# Altium PCB PCB.PcbDoc
Units mm, origin at the board's own origin, x right, y up, seen from the top; angles counter-clockwise.
Board outline 55 x 20 mm, 2 copper layers (Top Layer, Bottom Layer), stack 1.571 mm thick; 48 components, 36 nets, 184 pads, 34 vias.
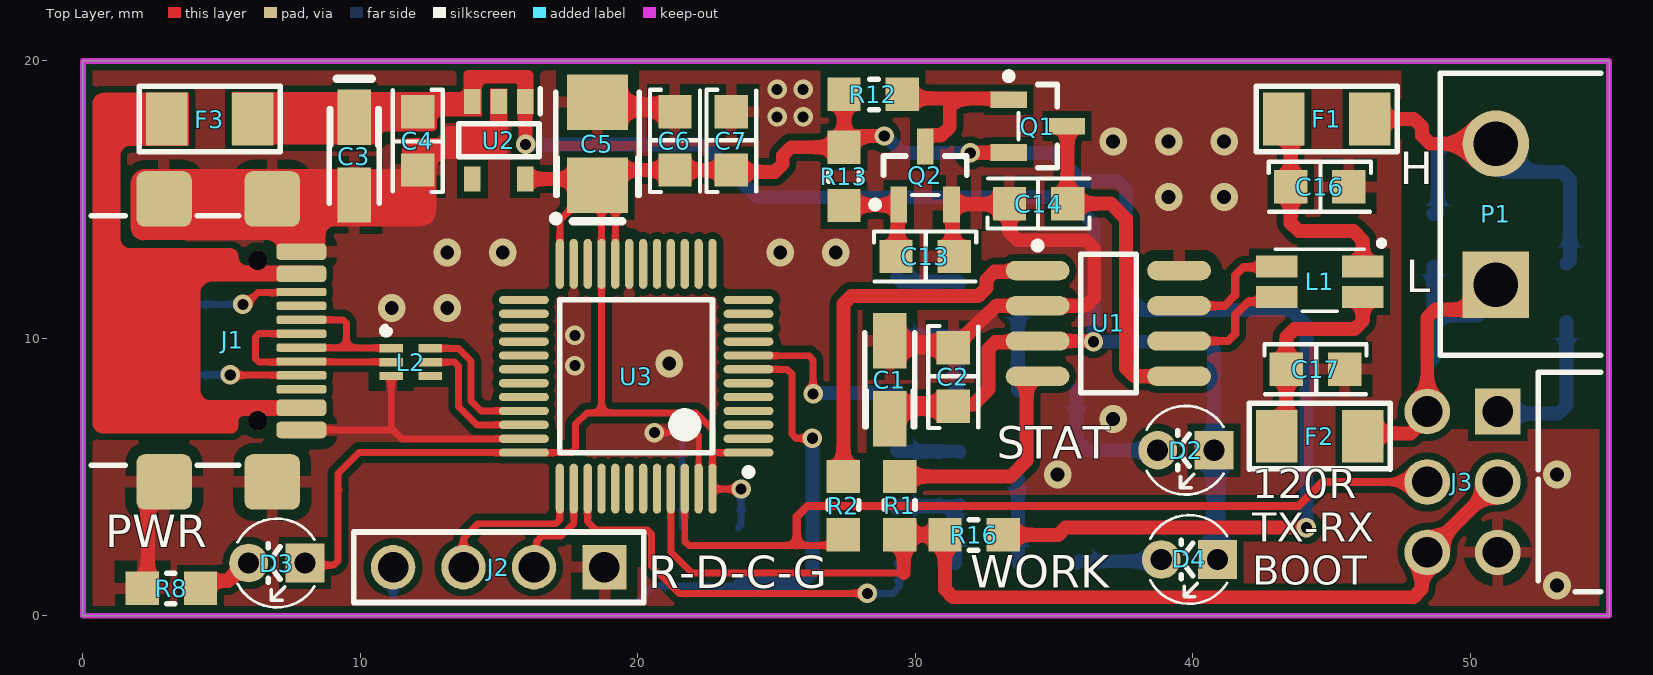
[diagram p0: Top Layer view]
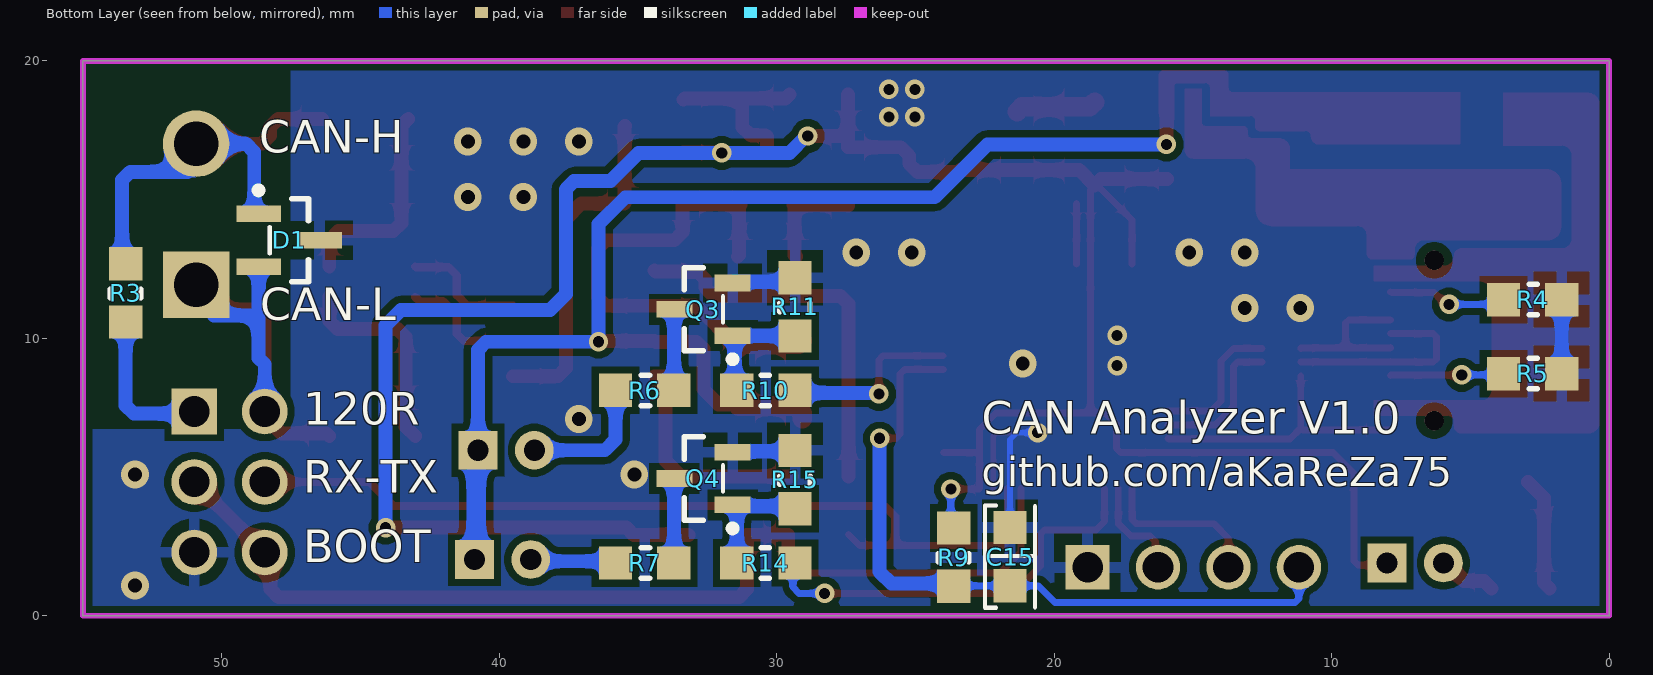
[diagram p1: Bottom Layer view, seen from below]

## Layer stack, top to bottom
Top Solder: solder mask 0.0102, Solder Resist, Dk 3.5
Top Layer: signal copper 0.0356
Dielectric 1: dielectric 1.5, FR-4, Dk 4.8
Bottom Layer: signal copper 0.0356
Bottom Solder: solder mask 0.0102, Solder Resist, Dk 3.5

## Board outline
0,0 55.003,0 55.003,20 0,20

## Design rules (kind name [scope] priority, off if disabled: settings)
AcuteAngle [All] p1: minimum=6.00000000000000E+0001 checktracksonly=TRUE
AssemblyTestPointUsage [All] p1 off:
AssemblyTestpoint [All] p1 off: testpointundercomponent=TRUE minsize=1.016 maxsize=2.54 preferedsize=1.524 minholesize=0 maxholesize=1.016 preferedholesize=0.813 testpointgrid=0.025 usegrid=TRUE gridtolerance=0 allowsidetop=TRUE allowsidebottom=TRUE
BoardOutlineClearance [All] p1: gap=0.2 ignorepadtopadclearanceinfootprint=FALSE
Clearance Poly_Clearance [All vs InPolygon] p1: gap=0.25 ignorepadtopadclearanceinfootprint=TRUE except(0.3: Arc-Hole Track-Hole SMDPad-Hole THPad-Hole Via-Hole Fill-Hole Poly-Hole Region-Hole Text-Hole)
Clearance [All] p2: gap=0.2 ignorepadtopadclearanceinfootprint=FALSE except(0.3: Arc-Hole Track-Hole SMDPad-Hole THPad-Hole Via-Hole Fill-Hole Poly-Hole Region-Hole Text-Hole)
FabricationTestPointUsage [All] p1 off: valid=0 allowmultiple=FALSE
FabricationTestpoint [All] p1 off: side=3 testpointundercomponent=TRUE minsize=1.016 maxsize=2.54 preferedsize=1.524 minholesize=0 maxholesize=1.016 preferedholesize=0.813 testpointgrid=0.025 allowsidetop=TRUE allowsidebottom=TRUE usegrid=TRUE gridtolerance=0
HoleSize [All] p1: absolutevalues=TRUE maxlimit=10 minlimit=0.4 maxpercent=80.000 minpercent=20.000
HoleToHoleClearance [All] p1: gap=0.3 allowstackedmicrovias=TRUE
MinimumAnnularRing [All] p1: minimumring=0.15
MinimumSolderMaskSliver [All] p1: minsoldermaskwidth=0.01
PolygonConnect [All] p1: thpad.connectstyle=Relief thpad.reliefconductorwidth=0.4 thpad.reliefentries=4 thpad.polygonreliefangle="90 Angle" thpad.airgapwidth=0.4 smdpad.connectstyle=Relief smdpad.reliefconductorwidth=0.4 smdpad.reliefentries=4 smdpad.polygonreliefangle="90 Angle" smdpad.airgapwidth=0.4 via.connectstyle=Direct via.reliefconductorwidth=0.254 via.reliefentries=4 via.polygonreliefangle="90 Angle" via.airgapwidth=0.254
RoutingVias [All] p1: holewidth=0.4 width=0.7 viastyle="Through Hole" minholewidth=0.4 minwidth=0.7 maxholewidth=3 maxwidth=6
SilkToSilkClearance [All] p1: silktosilkclearance=0
SilkToSolderMaskClearance [IsPad] p1: minsilkscreentomaskgap=0.01 clearancetoexposedcopper=TRUE
SolderMaskExpansion [All] p1: expansion=0.102 istentingtop=FALSE
Width [All] p1: maxlimit=10 minlimit=0.2 preferedwidth=0.3
21 further rules are at their usual default settings.

## Components (designator, comment, footprint, x,y, rotation, side; value= is the part's Value field where it differs from the comment)
C1 "10u" SMT_C_Tantalum_A 29.083,8.509 r90 top
C2 "100n" "CAP 0805/2012" 31.369,8.636 r90 top
C3 "4u7" SMT_C_Tantalum_A 9.779,16.57 r270 top
C4 "100n" "CAP 0805/2012" 12.065,17.096 r270 top
C5 "10u" SMT_C_Tantalum_B 18.542,17.018 r90 top
C6 "100n" "CAP 0805/2012" 21.336,17.145 r90 top
C7 "100n" "CAP 0805/2012" 23.368,17.145 r90 top
C13 "10u" "CAP 0805/2012" 30.378,12.954 r0 top
C14 "100n" "CAP 0805/2012" 34.417,14.859 r180 top
C15 "100n" "CAP 0805/2012" 21.59,2.159 r90 bottom
C16 "47p" "CAP 0805/2012" 44.602,15.469 r0 top
C17 "47p" "CAP 0805/2012" 44.45,8.89 r0 top
D1 "SM712" SOT23_M 47.574,13.538 r180 bottom
D2 "Yellow" LED-3mm_Yellow 39.751,5.969 r180 top
D3 "Green, 3'mm" led-3mm 6.985,1.905 r180 top
D4 "Red, 3'mm" LED-3mm(RED) 39.878,2.032 r180 top
F1 "200m" 1206_F 44.831,17.907 r0 top
F2 "200m" 1206_F 44.577,6.477 r0 top
F3 "250m" 1206_F 4.572,17.907 r0 top
J1 "16P" "USBC_SMD_16_USB4110 - Extended" 7.065,10.129 r90 top
J2 "4b" HDR_THT_4M_2.54mm 14.986,1.753 r180 top
J3 "3x2" HDR_THT_3x2M_2.54mm_RA 53.721,4.826 r90 top
L1 "Value?" FIL_DLW31SN900SQ2L_Extended 44.577,12.093 r180 top
L2 "ECMF02-2AMX6" SON50P150X170X55-6N 11.811,9.144 r0 top
P1 "2'Pin" Phoenix_2PIN_RA_P5.08mm 54.927,14.478 r90 top
Q1 "P-Channel" SOT23_N 34.417,17.653 r0 top
Q2 "NPN" SOT23_N 30.353,15.875 r90 top
Q3 "BC817" SOT23_N 32.639,11.049 r0 bottom
Q4 "BC817" SOT23_N 32.639,4.953 r0 bottom
R1 "22R" "RES 0805 (2012X06L)" 29.439,4.826 r270 top
R2 "22R" "RES 0805 (2012X06L)" 27.407,4.826 r270 top
R3 "120R" "RES 0805 (2012X06L)" 53.467,10.795 r90 bottom
R4 "4K7" "RES 0805 (2012X06L)" 1.905,11.397 r0 bottom
R5 "4K7" "RES 0805 (2012X06L)" 1.905,8.73 r0 bottom
R6 "330R" "RES 0805 (2012X06L)" 33.909,8.128 r0 bottom
R7 "330R" "RES 0805 (2012X06L)" 33.909,1.905 r0 bottom
R8 "330R" "RES 0805 (2012X06L)" 2.337,0.991 r0 top
R9 "10K" "RES 0805 (2012X06L)" 23.622,1.27 r90 bottom
R10 "4K7" "RES 0805 (2012X06L)" 31.237,8.128 r180 bottom
R11 "47K" "RES 0805 (2012X06L)" 29.337,10.287 r90 bottom
R12 "100K" "RES 0805 (2012X06L)" 29.332,18.796 r180 top
R13 "1M" "RES 0805 (2012X06L)" 27.432,14.991 r90 top
R14 "4K7" "RES 0805 (2012X06L)" 31.237,1.905 r180 bottom
R15 "47K" "RES 0805 (2012X06L)" 29.337,4.064 r90 bottom
R16 "10K" "RES 0805 (2012X06L)" 31.267,2.921 r0 top
U1 "TJA1051T-3" SO8_narrow_M 36.957,10.541 r0 top
U2 "3.3V" SOT95P280X130-5N 14.986,17.145 r270 top
U3 "STM32G431C8T6" LQFP48_N 19.939,8.636 r180 top

## Footprints (in the part's own frame and the unit in brackets; to place one, negate y for a bottom-side part, rotate by r counter-clockwise, add the part's x,y. Pads: shape width x height; smd on the part's side, far side on the other; paste and mask are expansions set on the pad)
1206_F [mm] "Surface mount FUSE 1206"
  rect 1.5x1.9 smd: 1(-1.55,0) 2(1.55,0)
  silkscreen extent -2.54,-1.18 2.54,1.18, body extent -2.64,-1.28 2.64,1.29, height 0.71
"CAP 0805/2012" [mm] "Chip Capacitor, 2-Leads, Body 2.00x1.20mm, IPC Medium Density"
  rect 1.2x1.2 smd: 1(-1.075,0) 2(1.025,0)
  silkscreen extent -1.86,-0.9 1.82,0.9, body extent -1.94,-0.97 1.89,0.98, height 1.15
FIL_DLW31SN900SQ2L_Extended [mm]
  rect 1.5x0.8 smd: 1(-1.55,-0.5) 2(1.55,-0.5) 3(1.55,0.6) 4(-1.55,0.6)
  silkscreen extent -2.32,-1.44 1.6,1.12, body extent -2.42,-1.54 2.4,1.18, height 1.27
HDR_THT_3x2M_2.54mm_RA [mm] "Pin Header, pitch 2.54 mm, THT, Angled, dual row, 6p"
  rect 1.65x1.65 hole 1.1: 1(2.54,2.73)
  round 1.65 hole 1.1: 2(2.54,5.27) 3(0,2.73) 4(0,5.27) 5(-2.54,2.73) 6(-2.54,5.27)
  silkscreen extent -3.96,-0.98 3.96,1.27, body extent -4.21,-7.52 4.21,6.34, height 5.08
HDR_THT_4M_2.54mm [mm] "Pin Header, pitch 2.54 mm, THT, Vertical, single row, 4p"
  rect 1.6x1.6 hole 1.1: 1(-3.81,0)
  round 1.6 hole 1.1: 2(-1.27,0) 3(1.27,0) 4(3.81,0)
  silkscreen extent -5.23,-1.27 5.23,1.27, body extent -5.48,-1.52 5.48,1.52, height 8.54
led-3mm [mil]
  rect 55x55 hole 30: 1(-40,0)
  round 55 hole 30: 2(40,0)
  silkscreen extent -53,-63 56,63, body extent -72,-65 72,65, height 157
LED-3mm(RED) [mil]
  rect 55x55 hole 30: 1(-40,0)
  round 55 hole 30: 2(40,0)
  silkscreen extent -53,-63 56,63, body extent -72,-65 72,65, height 197
LED-3mm_Yellow [mil]
  rect 55x55 hole 30: 1(-40,0)
  round 55 hole 30: 2(40,0)
  silkscreen extent -53,-63 56,63, body extent -72,-65 72,65, height 157
LQFP48_N [mm] "Thin QFP, 48-Leads, Body 7x7mm, Pitch 0.5mm, IPC Medium Density"
  oval 1.8x0.3 smd: 1(-4.05,2.75) 2(-4.05,2.25) 3(-4.05,1.75) 4(-4.05,1.25) 5(-4.05,0.75) 6(-4.05,0.25) 7(-4.05,-0.25) 8(-4.05,-0.75) 9(-4.05,-1.25) 10(-4.05,-1.75) 11(-4.05,-2.25) 12(-4.05,-2.75) 25(4.05,-2.75) 26(4.05,-2.25) 27(4.05,-1.75) 28(4.05,-1.25) 29(4.05,-0.75) 30(4.05,-0.25) 31(4.05,0.25) 32(4.05,0.75) 33(4.05,1.25) 34(4.05,1.75) 35(4.05,2.25) 36(4.05,2.75)
  oval 0.3x1.8 smd: 13(-2.75,-4.05) 14(-2.25,-4.05) 15(-1.75,-4.05) 16(-1.25,-4.05) 17(-0.75,-4.05) 18(-0.25,-4.05) 19(0.25,-4.05) 20(0.75,-4.05) 21(1.25,-4.05) 22(1.75,-4.05) 23(2.25,-4.05) 24(2.75,-4.05) 37(2.75,4.05) 38(2.25,4.05) 39(1.75,4.05) 40(1.25,4.05) 41(0.75,4.05) 42(0.25,4.05) 43(-0.25,4.05) 44(-0.75,4.05) 45(-1.25,4.05) 46(-1.75,4.05) 47(-2.25,4.05) 48(-2.75,4.05)
  silkscreen extent -4.18,-2.75 2.75,3.57, body extent -5.25,-5.25 5.25,5.25, height 1.6
Phoenix_2PIN_RA_P5.08mm [mm] "Phoenix 2 Pin; Pitch 5.08mm; Body 1016X1200"
  rect 2.4x2.4 hole 1.6: 1(-2.54,4)
  round 2.4 hole 1.6: 2(2.54,4)
  silkscreen extent -5.08,0.22 5.08,6, body extent -5.3,-6.22 5.31,6.23, height 8.5
"RES 0805 (2012X06L)" [mm] "Chip Resistor, 2-Leads, Body 2.0x1.3mm, IPC High Density _ (0.100 W)"
  rect 1.2x1.2 smd: 1(-0.2,0) 2(1.9,0)
  silkscreen extent 0.67,-0.55 0.98,0.55, body extent -0.9,-0.8 2.6,0.8, height 0.65
SMT_C_Tantalum_A [mm] "Capacitor, SM Tantalum; Body 3.2 x 1.6 mm (LxW typ)"
  rect 2x1.2 smd: 1(-1.4,0) 2(1.4,0)
  silkscreen extent -1.7,-0.9 1.7,0.9, body extent -2.59,-1.07 2.59,1.07, height 1.8
SMT_C_Tantalum_B [mm] "Capacitor, SM Tantalum; Body 3.5 x 2.8 mm (LxW typ)"
  rect 2x2.2 smd: 1(-1.5,0) 2(1.5,0)
  silkscreen extent -2.82,-1.5 1.85,1.62, body extent -2.95,-1.7 2.72,1.75, height 2.1
SO8_narrow_M [mm] "8-Pin Small Outline Package (SO8), IPC Low Density"
  oval 2.3x0.7 smd: 1(-2.55,1.905) 2(-2.55,0.635) 3(-2.55,-0.635) 4(-2.55,-1.905) 5(2.55,-1.905) 6(2.55,-0.635) 7(2.55,0.635) 8(2.55,1.905)
  silkscreen extent -2.67,-2.5 1,2.93, body extent -4.25,-3.05 4.25,3.06, height 1.73
SON50P150X170X55-6N [mm]
  rect 0.85x0.3 smd: 1(-0.7,0.5) 2(-0.7,0) 3(-0.7,-0.5) 4(0.7,-0.5) 5(0.7,0) 6(0.7,0.5)
  silkscreen extent -1.01,1.01 -0.76,1.26, body extent -1.4,-1.15 1.4,1.4, height 1.6
SOT23_M [mm] "SOT23, 3-Leads, Body 2.9x1.3mm, Pitch 0.95mm, Lead Span 2.3mm, IPC Low Density"
  rect 1.6x0.6 smd: 1(-1.1,0.95) 2(-1.1,-0.95) 3(1.1,0)
  silkscreen extent -1.23,-1.5 0.7,1.92, body extent -2.45,-2.05 2.45,2.05, height 1.1
SOT23_N [mm] "SOT23, 3-Leads, Body 2.9x1.3mm, Pitch 0.95mm, Lead Span 2.3mm, IPC Medium Density"
  rect 1.3x0.6 smd: 1(-1.05,0.95) 2(-1.05,-0.95) 3(1.05,0)
  silkscreen extent -1.17,-1.5 0.7,1.92, body extent -2,-1.8 2,2.05, height 1.1
SOT95P280X130-5N [mm]
  rect 0.9x0.6 smd: 1(-1.4,0.95) 2(-1.4,0) 3(-1.4,-0.95) 4(1.4,-0.95) 5(1.4,0.95)
  silkscreen extent -1.85,-1.45 0.6,1.5, body extent -2.13,-1.83 2.13,1.82, height 1.6
"USBC_SMD_16_USB4110 - Extended" [mm] "CONN, USB, Type C, USB4110"
  rrect50% 0.6x1.8 smd mask+0.075: A1B12(2.997,-0.805) A4B9(2.197,-0.805) B1A12(-3.428,-0.805) B4A9(-2.628,-0.805)
  rrect50% 0.3x1.8 smd mask+0.075: A5(1.043,-0.805) A6(0.041,-0.805) A7(-0.46,-0.805) A8(-1.461,-0.805) B5(-1.962,-0.805) B6(-0.961,-0.805) B7(0.542,-0.805) B8(1.544,-0.805)
  rrect30% 2x2 smd: S1(4.897,0.244) S2(-5.303,0.244) S3(4.897,4.144) S4(-5.303,4.144)
  round 0.7 hole 0.7 unplated: ""(-3.093,0.764) ""(2.687,0.764)
  silkscreen extent -4.7,1.45 4.3,6.77, body extent -6.4,-1.78 6,7.32, height 3.26

## Part data
C1 C5: library part Cap_Tantalum, "Tantalum Capacitor,TAJ Series-SMD", Package=Package?, Rating=6V3, Inflow=inflow?, Type=Tantalum, Validation=Valid
C2 C4 C6 C7 C14 C15: library part Cap_Multi_SMD_100nF_0805, "Bipolar ceramic capacitor SMD", Package=0805, Rating=50V, Inflow=inflow?, Type=MultiLayer
  C2 C6 C7 C14 C15: Validation=Valid
C3: library part Cap_Tantalum, "Tantalum Capacitor,TAJ Series-SMD", Package=SMD-A, Rating=6.3V, Inflow=inflow?, Type=Tantalum
C13 C16 C17: library part Cap_Multi_SMD_0805, "Bipolar ceramic capacitor SMD", Package=0805, Rating=Rating?, Inflow=inflow?, Type=MultiLayer, Validation=Valid
D1: library part Semi_Diod_TVS_SM712, "TVS, ESD PROTECT, 2CH, 400W/17A PP, 7.5VBR, ±8KV ESDmin", Package=Package?, Rating=Rating?, Inflow=inflow?, Type=Type?, Validation=Valid
D2: library part Semi_LED_Yellow_3, "LED", Package=3mm, Rating=Rating?, Inflow=7145, Type=LED, Validation=Valid
D3: library part Semi_LED_Green_3, "LED", Package=Package?, Rating=Rating?, Inflow=7145, Type=Type?, Validation=Valid
D4: library part Semi_LED_Red_3, "LED", Package=Package?, Rating=Rating?, Inflow=7142, Type=Type?, Validation=Valid
F1 F2: library part Other_Elec_PFUSE_SMD, "SMD Resettable Fuses", Package=1206, Rating=24V, Inflow=inflow?, Type=Resettable, Validation=Valid
F3: library part Other_Elec_Fuse_SMD, "Short circiut  protection", Package=1206, Rating=Rating?, Inflow=0.5A, Type=Fast
J1: library part Con_USB_C_16P, "USB C Female Connector", Package=SMD, Rating=Rating?, Inflow=inflow?, Type=C, Validation=NT
J2: library part Con_MPH_4x1_V_THT_2.54, "Header, single row, 4 pin", Package=Dip, Rating=4x1, Inflow=7152, Type=Vertical, Validation=NT
J3: library part Con_MPH_3x2_V_THT_2.54, "Header, dual row, 6 pin", Package=Package?, Rating=Rating?, Inflow=7152, Type=Type?, Validation=NT
L1: library part Ind_EMI_DLW31SN900SQ2L, "2 Line Common Mode Choke Surface Mount 90 Ohms @ 100 MHz 370mA DCR 300mOhm", Package=Package?, Rating=Rating?, Inflow=inflow?, Type=Type?, Validation=Valid
L2: library part Ind_EMI_ECMF02-2AMX6, "Common Mode Filter with ESD Protection for USB 2.0 and MIPI D-PHY/MDDI Interface", Package=QFN-6, Rating=2.5R, Type="EMI Filters", Validation=NT
P1: library part Con_Power_2, "Power Connector 2'Pin", Package=Package?, Rating=Rating?, Inflow=inflow?, Type=Type?, Validation=NT
Q1: library part Semi_MOSFET_Si2301DS, "P-Channel MOSFET", Package=Package?, Rating=Rating?, Inflow=6208, Type=Type?, Validation=NT
Q2: library part Semi_BJT_SS8050, "NPN General purpose Transistor", Package=Package?, Rating=Rating?, Inflow=5256, Type=Type?, Validation=Valid
Q3 Q4: library part Semi_BJT_BC817, "NPN General purpose Transistor", Package=Package?, Rating=Rating?, Inflow=inflow?, Type=NPN, Validation=Valid
R1 R2 R3 R4 R5 R6 R7 R8 R9 R10 R11 R12 R13 R14 R15 R16: library part Res_SMD_0805, "Resistor", Package=0805, Rating=0.125W, Inflow=inflow?
  R1 R2 R6 R7 R8 R9 R10 R11 R12 R13 R14 R15 R16: Type=10%, Validation=Valid
  R3: Type=1%, Validation=Valid
  R4 R5: Type=10%
U1: library part IC_Converter_TJA1051T-3, "High-Speed CAN Transceiver That Provides an Interface Between a CAN Protocol Controller and The Physical Two-Wire CAN Bus.", Package=SOIC-8, Rating=5Mbits/s, Inflow=inflow?, Type=CAN-FD, Validation=NT
U2: library part IC_Reg_TLV74333PDBVR, "Fixed LDO Voltage Regulator 3.3V 300mA SOT-23-5", Package=SOT-23-5, Rating=300m, Inflow=inflow?, Type=LDO, Validation=Valid
U3: library part IC_MCU_STM32G431C8T6, "32-Bit mircrocontroller", Package=LQFP48, Rating=CORTEX-M4, Inflow=inflow?, Type=Microcontroller, Validation=NT

## Via types
v1: diameter 0.7, hole 0.4, Top Layer to Bottom Layer, tented both sides, 17 vias
v2: diameter 1, hole 0.5, Top Layer to Bottom Layer, tented both sides, 16 vias
v3: diameter 0.7, hole 0.4, Top Layer to Bottom Layer, 1 vias

## Nets (pads, with @x,y where several pads share a name; then routed paths per layer and width w, separated by ;. In a path a pad name is that pad's centre, name@x,y a point inside that pad or via, vN(x,y) a via of type N, cw(c..) or ccw(c..) an arc to the next point about the centre after c; other vN are vias at no path point)
+3V3: C5.1 C6.1 C7.1 D3.1 Q1.2 R9.2 R12.2 R13.2 R16.2 U2.5 U3.1 U3.20 U3.21 U3.24 U3.36 U3.48 | length 94.6
  Top Layer w0.25: D3.1 8.077,1.829 9.048,1.829 9.195,1.975 9.195,4.572 ; 9.22,4.547 9.195,4.572 ; U3.24 17.189,14.265 C5.1@18.442,15.518 ; C5.1@18.689,15.371 U3.21 18.689,7.315 ; U3.20 C5.1@19.189,14.871 ; v1(23.724,4.572) 22.703,4.572 U3.48 22.689,5.759 ; U3.1 22.816,5.886 22.689,5.759 ; 9.195,4.572 9.195,5.131 9.95,5.886 U3.36 17.608,5.886 17.755,6.032 17.755,6.909 18.161,7.315 18.689,7.315 ; 18.689,7.315 22.098,7.315 22.689,6.724 22.689,5.759
  Top Layer w0.5: U2.5 C5.1@18.315,15.745 ; C5.1 19.094,16.07 C6.1 C7.1 23.436,16.002 24.929,16.002 25.222,16.295 25.222,16.586 25.527,16.891 R13.2 R12.2 ; R13.2@27.432,17.297 v1(28.88,17.297) ; v1(31.979,16.688) 31.986,16.695 33.359,16.695 Q1.2 ; R16.2 35.154,2.921 35.413,3.18 44.089,3.18 v3(44.094,3.175)
  Bottom Layer w0.25: R9.2 23.724,3.272 v1(23.724,4.572)
  Bottom Layer w0.5: v1(28.88,17.297) 28.934,17.297 29.544,16.688 v1(31.979,16.688) 34.976,16.688 35.992,15.672 37.299,15.672 37.592,15.379 37.592,11.608 38.176,11.024 43.544,11.024 44.094,10.473 v3(44.094,3.175)
+5V0: C1.1 C2.1 C3.1 C4.1 D2.1 D4.1 F3.2 U1.3 U2.1 U2.3 | length 49
  Top Layer w0.5: U2.1 15.944,18.537 15.944,17 v1(15.951,16.993) ; C2.1 31.428,7.62 32.092,7.62 32.639,8.167 32.639,9.613 32.894,9.868 34.369,9.868 U1.3 36.424,9.906 v1(36.424,9.881)
  Top Layer w0.7: C1.1 29.083,7.311 29.333,7.561 C2.1
  Bottom Layer w0.5: v1(15.951,16.993) 22.403,16.993 24.308,15.088 35.458,15.088 36.424,14.122 v1(36.424,9.881) 40.474,9.881 40.767,9.588 D2.1
  Bottom Layer w0.7: D2.1 40.831,5.905 40.831,2.095 D4.1
CAN_H: D1.1 F1.2 P1.2 R3.2 | length 16.4
  Top Layer w0.5: F1.2 47.967,17.907 48.26,17.614 48.26,17.311 48.553,17.018 P1.2
  Bottom Layer w0.5: D1.1 48.781,14.488 48.831,14.538 48.831,16.725 49.124,17.018 P1.2 51.234,16.711 51.234,16.002 53.301,16.002 53.594,15.709 53.594,12.822 R3.2
CAN_L: D1.2 F2.2 J3.2 P1.1 | length 17.5
  Top Layer w0.5: F2.2 46.229,6.579 47.854,6.579 48.451,7.176 48.451,10.746 48.744,11.039 50.028,11.039 P1.1
  Bottom Layer w0.5: J3.2 48.451,9.069 48.68,9.298 48.68,10.828 ; D1.2 48.674,10.834 48.68,10.828 ; P1.1 50.283,11.294 50.283,10.828 48.68,10.828
CAN_RX/BOOT: J3.3 J3.6 R1.2 R16.1 U3.45 | length 38.1
  Top Layer w0.25: U3.45 21.189,2.306 21.946,1.549 29.439,1.549
  Top Layer w0.5: 29.585,1.549 29.585,2.921 29.588,2.924 R16.1@31.065,2.924 ; R16.1 31.067,0.962 31.36,0.669 47.952,0.669 48.245,0.962 48.245,2.08 J3.3
CAN_TX: J3.4 R2.2 U3.46 | length 32.1
  Top Layer w0.25: U3.46 21.689,2.686 21.835,2.54 25.73,2.54 27.021,2.54 R2.2
  Top Layer w0.3: 25.73,2.54 25.73,3.581 26.111,3.962 43.815,3.962 44.679,4.826 J3.4
GND: C1.2 C2.2 C3.2 C4.2 C5.2 C6.2 C7.2 C13.2 C14.2 C15.2 C16.2 C17.2 D1.3 J1.A1B12 J1.B1A12 J1.S1 J1.S2 J1.S3 J1.S4 J2.1 J3.5 L2.3 Q2.2 Q3.2 Q4.2 R4.1 R5.1 R8.1 R11.2 R15.2 U1.2 U1.8 U2.2 U3.19 U3.23 U3.35 U3.47 | length 50.6
  Top Layer w0.2: v1(20.592,6.603) 22.072,6.603 22.189,6.486 U3.47
  Top Layer w0.25: J1.B1A12 11.049,6.701 11.111,6.763 ; L2.3 11.111,6.763 ; U3.35 15.879,6.376 11.498,6.376 11.111,6.763
  Top Layer w0.5: R8.1 2.341,1.194 2.341,4.246 J1.S4 ; C2.2 32.426,10.718 32.446,10.718 32.904,11.176 U1.2 36.156,11.176 36.449,11.469 36.449,13.245 36.156,13.538 33.685,13.538 33.392,13.831 C14.2 33.375,14.842 31.32,14.842 Q2.2 31.353,14.775 31.353,13.004 C13.2
  Top Layer w0.7: C5.2 18.716,18.344 21.162,18.344 C6.2 ; C1.2 29.207,9.785 31.245,9.785 C2.2
  Bottom Layer w0.2: v1(20.592,6.603) 21.335,6.603 21.336,6.604 21.59,6.35 C15.2
  Bottom Layer w0.5: R5.1 R4.1 ; R15.2 29.368,5.933 31.558,5.933 Q4.2 ; R11.2 29.475,12.049 31.539,12.049 Q3.2
  other v1: 17.729,9.017 17.729,10.109 25.019,17.983 25.959,17.983 25.019,18.974 25.959,18.974
  other v2: 53.131,1.098 35.131,5.098 53.131,5.098 37.131,7.098 21.131,9.098 11.131,11.098 13.131,11.098 13.131,13.098 15.131,13.098 25.131,13.098 27.131,13.098 39.131,15.098 41.131,15.098 37.131,17.098 39.131,17.098 41.131,17.098
LED_STAT: R10.2 U3.8 | length 6.7
  Top Layer w0.25: U3.8@24.011,9.376 26.168,9.376 26.314,9.23 v1(26.314,8.001)
  Bottom Layer w0.5: v1(26.314,8.001) 26.353,8.039 29.248,8.039 R10.2
LED_WORK: R14.2 U3.39 | length 15.1
  Top Layer w0.25: U3.39 18.189,3.401 18.491,3.099 20.351,3.099 20.498,2.952 20.498,1.803 21.488,0.813 v1(28.27,0.813)
  Bottom Layer w0.25: v1(28.27,0.813) 29.191,0.813 29.413,1.035 29.413,1.829 R14.2
NetC13_1: C13.1 Q2.1 R13.1 | length 3.9
  Top Layer w0.5: R13.1 27.449,14.808 Q2.1@29.386,14.808 ; C13.1 29.353,13.004 29.353,14.775 Q2.1@29.386,14.808 ; Q2.1 Q2.1@29.386,14.808
NetC16_1: C16.1 F1.1 L1.1 | length 7.7
  Top Layer w0.5: F1.1 43.527,17.661 C16.1 43.527,14.161 43.82,13.868 45.796,13.868 46.127,13.538 L1.1
NetC17_1: C17.1 F2.1 L1.4 | length 7.6
  Top Layer w0.5: F2.1 43.375,6.825 43.375,10.045 43.667,10.338 45.834,10.338 46.127,10.631 L1.4
NetD2_2: D2.2 R6.2 | length 4.9
  Bottom Layer w0.5: R6.2 35.809,6.355 36.195,5.969 D2.2
NetD3_2: D3.2 R8.2 | length 2.1
  Top Layer w0.5: R8.2 4.507,1.26 5.228,1.26 5.872,1.905 D3.2
NetD4_2: D4.2 R7.2 | length 3.1
  Bottom Layer w0.5: R7.2 35.872,1.968 38.798,1.968 D4.2
NetF3_1: F3.1 J1. J1.A4B9 J1.B4A9
NetJ1_A6: J1.A6 J1.B6 L2.2 | length 7.4
  Top Layer w0.25: J1.A6 6.34,10.17 6.223,10.053 6.223,9.261 6.34,9.144 7.846,9.144 J1.B6 7.883,9.156 11.099,9.156 L2.2
NetJ1_A7: J1.A7 J1.B7 L2.1 | length 5.8
  Top Layer w0.25: J1.A7 7.884,9.657 9.491,9.657 ; J1.B7 7.874,10.668 9.374,10.668 9.491,10.551 9.491,9.657 ; L2.1 11.098,9.657 9.491,9.657
NetJ1_A8: J1.A8 R5.2 | length 4.1
  Top Layer w0.25: v1(5.309,8.687) 5.318,8.677 7.861,8.677 J1.A8
  Bottom Layer w0.25: R5.2 3.848,8.687 v1(5.309,8.687)
NetJ1_B8: J1.B8 R4.2 | length 4.3
  Top Layer w0.25: v1(5.766,11.227) 5.888,11.227 6.309,11.648 7.846,11.648 J1.B8
  Bottom Layer w0.25: R4.2 3.975,11.227 v1(5.766,11.227)
NetJ3_1: J3.1 R3.1 | length 5.6
  Bottom Layer w0.5: J3.1 51.067,7.29 53.174,7.29 53.467,7.583 R3.1
NetL1_2: L1.2 U1.7 | length 4.5
  Top Layer w0.3: U1.7 41.148,11.176 41.529,11.557 41.529,12.27 41.827,12.568 43.003,12.568 L1.2
NetL1_3: L1.3 U1.6 | length 4.6
  Top Layer w0.3: U1.6 41.275,9.906 41.529,10.16 41.529,10.85 42.006,11.327 42.861,11.327 L1.3
NetQ1_1: Q1.1 Q2.3 R12.1 | length 6.5
  Top Layer w0.5: R12.1 29.675,18.653 31.535,18.653 ; Q2.3 30.353,17.275 30.403,17.325 30.949,17.325 31.242,17.618 31.242,18.36 31.535,18.653 ; Q1.1 33.317,18.653 31.535,18.653
NetQ3_1: Q3.1 R10.1 R11.1 | length 4.3
  Bottom Layer w0.5: R11.1 29.343,10.093 Q3.1@31.557,10.093 ; R10.1 31.513,8.204 31.513,10.049 Q3.1@31.557,10.093 ; Q3.1 31.563,10.099 Q3.1@31.557,10.093
NetQ3_3: Q3.3 R6.1 | length 2.9
  Bottom Layer w0.5: Q3.3 33.699,11.039 33.699,8.138 R6.1
NetQ4_1: Q4.1 R14.1 R15.1 | length 4.4
  Bottom Layer w0.5: R15.1 29.426,3.953 Q4.1@31.437,3.953 ; R14.1 Q4.1@31.437,3.953 ; Q4.1 31.539,3.953 Q4.1@31.437,3.953
NetQ4_3: Q4.3 R7.1 | length 3.1
  Bottom Layer w0.5: Q4.3 33.699,4.943 33.699,1.915 R7.1
NetR1_1: R1.1 U1.4 | length 8.2
  Top Layer w0.5: R1.1 33.44,5.026 34.011,5.596 34.011,8.544 34.103,8.636 U1.4
NetR2_1: R2.1 U1.1 | length 13.9
  Top Layer w0.5: R2.1 27.407,11.239 27.699,11.532 32.27,11.532 32.563,11.824 32.563,12.115 32.856,12.408 34.369,12.408 U1.1
Reset: C15.1 J2.4 R9.1 U3.7 | length 26.2
  Top Layer w0.25: U3.7 25.385,8.886 25.552,8.718 25.552,6.547 25.699,6.401 v1(26.289,6.401)
  Bottom Layer w0.25: J2.4 11.176,0.629 11.322,0.483 19.964,0.483 20.565,1.084 C15.1 23.608,1.084 R9.1
  Bottom Layer w0.5: R9.1 23.72,1.168 25.869,1.168 26.289,1.588 v1(26.289,6.401)
SWCLK: J2.2 U3.38 | length 3.8
  Top Layer w0.25: J2.2 16.349,1.845 16.349,2.68 16.54,2.871 17.223,2.871 17.689,3.337 U3.38
SWDIO: J2.3 U3.37 | length 5.9
  Top Layer w0.25: J2.3 13.716,2.794 14.243,3.321 17.037,3.321 17.189,3.473 U3.37
USB_DN: L2.6 U3.33 | length 5.2
  Top Layer w0.25: L2.6 13.528,9.644 13.989,9.183 13.989,7.737 14.34,7.386 U3.33
USB_DP: L2.5 U3.34 | length 5.2
  Top Layer w0.25: L2.5 13.391,9.144 13.539,8.996 13.539,7.551 13.589,7.501 13.589,7.493 14.196,6.886 U3.34
VIO: C14.1 Q1.3 U1.5 | length 12.6
  Top Layer w0.5: Q1.3 35.48,17.64 35.48,14.872 C14.1 37.045,14.859 37.592,14.312 37.592,8.929 37.885,8.636 U1.5
pads on no net: J1.A5 J1.B5 L2.4 U2.4 U3.2 U3.3 U3.4 U3.5 U3.6 U3.9 U3.10 U3.11 U3.12 U3.13 U3.14 U3.15 U3.16 U3.17 U3.18 U3.22 U3.25 U3.26 U3.27 U3.28 U3.29 U3.30 U3.31 U3.32 U3.40 U3.41 U3.42 U3.43 U3.44

## Polygon pours and split planes (outlines as drawn)
GND on Top Layer "GND_L01_P000" (solid, remove dead copper, pour order 0): 0,20.041 0,0 54.991,0 54.991,6.731 47.523,6.731 47.523,20.015
GND on Bottom Layer "GND_L02_P002" (solid, remove dead copper, pour order 2): 0,20.041 0,0 54.991,0 54.991,6.731 47.523,6.731 47.523,20.015

## Keep-outs
Keep-Out Layer:
  the board outline again, w0.2

## Other copper
Top Layer:
  region net GND: 2.184,13.538 6.655,13.538 cw(c6.655,13.183) 7.01,13.183 7.01,12.99 ccw(c7.148,12.99) 7.148,12.852 8.534,12.852 ccw(c8.534,13.056) 8.738,13.056 8.738,13.716 cw(c9.068,13.716) 9.068,14.046 12.167,14.046 ccw(c12.167,14.605) 12.725,14.605 12.725,16.104 cw(c13.106,16.104) 13.106,16.485 15.011,16.485 ccw(c15.011,16.764) 15.291,16.764 15.291,18.999 14.681,18.999 14.681,17.805 cw(c14.529,17.805) 14.529,17.653 13.183,17.653 ccw(c13.183,17.501) 13.03,17.501 13.03,17.399 cw(c12.852,17.399) 12.852,17.221 11.887,17.221 ccw(c11.887,16.84) 11.506,16.84 11.506,16.104 2.235,16.104 ccw(c2.235,15.596) 1.727,15.596 1.727,13.995 ccw(c2.184,13.995)
  region net +5V0: 15.672,18.104 16.231,18.104 16.231,19.482 ccw(c16.053,19.482) 16.053,19.66 13.868,19.66 ccw(c13.868,19.507) 13.716,19.507 13.716,19.05 cw(c13.538,19.05) 13.538,18.872 5.359,18.872 5.359,16.993 10.465,16.993 ccw(c10.465,17.272) 10.744,17.272 cw(c10.947,17.272) 10.947,17.475 12.598,17.475 ccw(c12.598,17.628) 12.751,17.628 12.751,17.831 cw(c12.929,17.831) 12.929,18.009 14.376,18.009 14.376,19.025 cw(c14.554,19.025) 14.554,19.202 15.545,19.202 cw(c15.545,19.075) 15.672,19.075 15.672,18.237
  region net NetF3_1: 5.588,6.833 5.588,6.985 cw(c5.817,6.985) 5.817,7.214 8.484,7.214 8.484,7.772 4.597,7.772 cw(c4.597,8.15) 4.219,8.151 4.226,11.62 cw(c4.661,11.619) 4.661,12.054 8.484,12.054 8.484,12.613 5.954,12.613 cw(c5.954,12.979) 5.588,12.979 ccw(c5.319,12.979) 5.319,13.248 1.713,13.248 cw(c1.713,13.614) 1.346,13.614 1.346,16.586 cw(c1.702,16.586) 1.702,16.942 3.81,16.942 3.81,18.847 0.737,18.847 ccw(c0.737,18.466) 0.356,18.466 0.356,6.934 ccw(c0.711,6.934) 0.711,6.579 5.334,6.579 ccw(c5.334,6.833)

## Silkscreen, mask and mechanical layers (free items; w line width, h text height)
Top Overlay:
  text "H" at 47.466,15.157 h2
  text "L" at 47.668,11.271 h2
  text "STAT" at 32.932,5.274 h2
  text "120R" at 42.135,3.903 h1.8
  text "TX-RX" at 42.135,2.334 h1.8
  text "PWR" at 0.806,2.076 h2
  text "BOOT" at 42.135,0.779 h1.8
  text "WORK" at 31.972,0.625 h2
  text "R-D-C-G" at 20.38,0.599 h2
Bottom Overlay:
  text "CAN-H" at 48.647,16.297 h2
  text "CAN-L" at 48.622,10.252 h2
  text "120R" at 47.073,6.491 h2
  text "CAN Analyzer V1.0" at 22.606,6.172 h2
  text "github.com/aKaReZa75" at 22.606,4.331 h1.8
  text "RX-TX" at 47.073,4.038 h2
  text "BOOT" at 47.073,1.54 h2

## Text inside footprints (layer, text, board x,y; h text height)
J1: Mechanical 13 "PCB EDGE" at -0.379,3.926 h0.8 r90